# EAGLE board NSL_Annoy (EAGLE 5.11)
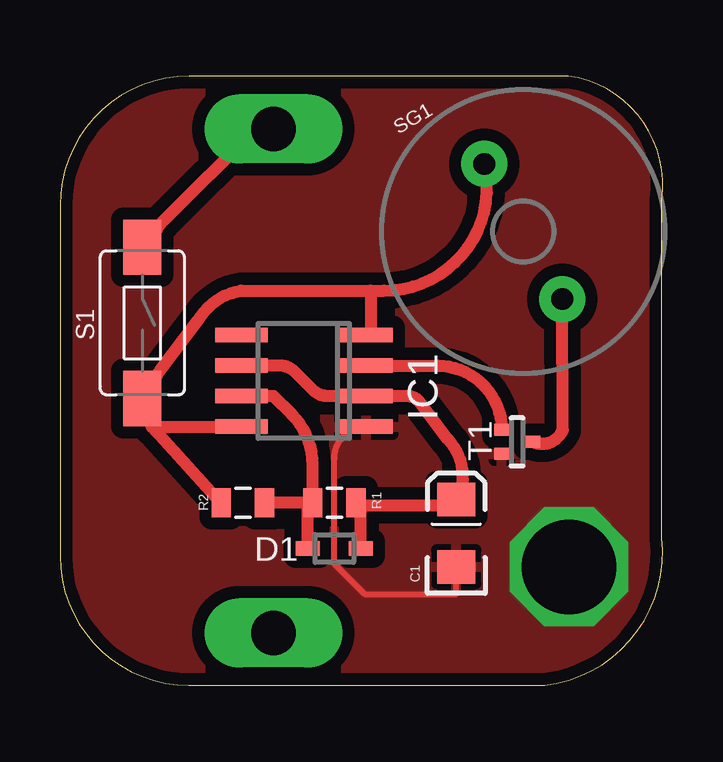
[diagram p0: board, top side]
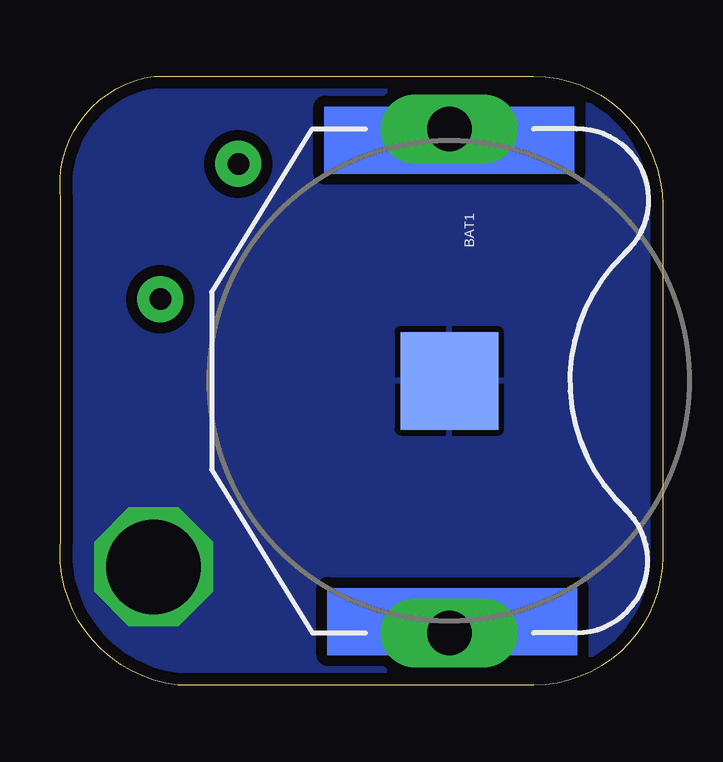
[diagram p1: board, bottom side, seen from below]

Size 25.11 x 25.38 mm. Coordinates in mm from the lower left corner, seen from the top.
Outline: 20.2,0 arc90 25.07,6.14 25.07,20.22 arc90 21.18,25.38 5.39,25.38 arc90 0,19.99 0,5.37 arc90 5.37,0 20.2,0
Copper layers (1*16): Top 0.0356mm / dielectric 1.5011mm / Bottom 0.0356mm
Design rules "SilverCircuits *": minimum track width 7mil, minimum drill 14mil, track to track 7mil, track to pad 7mil, pad to pad 7mil, via to via 7mil, smd to smd 0mil, copper to edge 20mil, drill to drill 8mil, minimum pad ring 10mil, minimum via ring 8mil, stop-mask expansion 4mil, vias tented up to drill 0mil, thermal gap 10mil
Net classes: 0 default: width 0.508 mm
Milling: 8 lines

## Footprints (pad centres in the part's own frame; a part is rotated, then mirrored left to right if it is on the bottom)
BATTERY_20MM_PTH_COMPACT = drill 1.854 long: 1 -10.5,0; 3 10.5,0 | smd 4.064 x 4.064: 2 0,0
EIA3216 = smd 1.4 x 1.6: A 1.4,0; C -1.4,0
SOD323 = smd 1 x 0.6: 1 -1.1,0; 2 1.1,0
SO08 = smd 0.6 x 2.2: 1 -1.905,-2.6; 2 -0.635,-2.6; 3 0.635,-2.6; 4 1.905,-2.6; 5 1.905,2.6; 6 0.635,2.6; 7 -0.635,2.6; 8 -1.905,2.6
0805 = smd 0.8 x 1.2: 1 -0.9,0; 2 0.9,0
SPARKFUN_TACTILE-SWITCH-1101NE = smd 2.3 x 1.6: P$1 -3.15,0; P$2 3.15,0
BUZZER-12MM-NS = drill 0.9 round: + 3.25,0; - -3.25,0
SOT416 = smd 0.6 x 0.5: 1 0.65,-0.5; 2 0.65,0.5; 3 -0.65,0

## Placement (x,y rotation side)
BAT1  [BATTERY_20MM_PTH_COMPACT]  8.89,12.68 270 bottom
C1  10uF  [EIA3216]  16.51,6.33 90 top
D1  1n914  [SOD323]  11.43,5.7 180 top
IC1  NE555D  [SO08]  10.16,12.68 90 top
R1  10Mohm  [0805]  11.43,7.6 0 top
R2  20K  [0805]  7.62,7.6 180 top
S1  [SPARKFUN_TACTILE-SWITCH-1101NE]  3.43,15.09 270 top
SG1  BUZZER  [BUZZER-12MM-NS]  19.3,18.9 120 top
T1  [SOT416]  19.05,10.14 180 top

## Library data of the parts
BAT1 = SparkFun; OC_NEWARK: unknown
C1 = SparkFun; MF: VISHAY/SPRAGUE; MPN: 293D106X96R3A2TE3; OC_NEWARK: 09K5861
D1 = zetex; MPN: CDSOD323-T05C; OC_FARNELL: 1824860; OC_NEWARK: 79R6078
IC1 = linear; MF: TEXAS INSTRUMENTS; MPN: NE555DR; OC_NEWARK: 75C4440
R1 = SparkFun; MPN: MCHP05W4F1005T5E; OC_NEWARK: 01N6992
R2 = SparkFun; MPN: RC0805JR-0720KL; OC_NEWARK: 68R0266
S1 = Nullspace; OC_NEWARK: unknown
SG1 = SparkFun; MPN: ABT-436-RC; OC_NEWARK: 25M7506
T1 = tvbgone-adj

## Nets
2: C1.A D1.1 IC1.2 IC1.6 R1.2
3: IC1.3 T1.1
5: IC1.5
7: D1.2 IC1.7 R1.1 R2.1
GND: BAT1.2 C1.C IC1.1 T1.2
N$1: BAT1.1 S1.P$1
N$9: SG1.- T1.3
VCC: IC1.4 IC1.8 R2.2 S1.P$2 SG1.+

## Tracks (layer width: path | path; a pad name or v marks a point on that pad's centre or on a via)
2
  Top 0.508: IC1.6 9.15,13.32 arc-45 9.79,13.05 10.53,12.31 arc45 11.17,12.04 IC1.2 14.47,12.04 arc-45 14.96,11.84 16.16,10.26 arc-45 16.79,8.57 16.79,7.57 16.56,7.5 | D1.1 12.53,7.6 12.34,7.6 R1.2 12.55,7.27 12.62,7.5 16.56,7.5 | 16.56,7.5 C1.A
3
  Top 0.508: IC1.3 15.73,13.32 arc-90 T1.1
7
  Top 0.508: IC1.7 8.89,12.04 9.67,11.26 arc-45 10.53,9.2 R1.1 10.24,7.6 | 10.24,7.6 R2.1 | D1.2 10.33,7.37 | 10.33,7.37 10.33,7.6 | 10.33,7.37 10.34,7.37 10.24,7.6
GND  (via drill 3.94)
  Top 0.254: IC1.1 arc90 11.43,9.45 11.43,5.06 12.7,3.79 16.51,3.79 C1.C
  other vias: 21.21,4.93
  pour Bottom (isolate 0.457): 25.4,20.8 arc90 20.82,25.38 5.39,25.38 arc90 0,19.99 0,5.37 arc90 5.39,-0.02 18.92,-0.02 arc90 25.4,6.46
  pour Top (isolate 0.508): 25.4,20.8 arc90 20.82,25.38 5.68,25.38 arc90 0,19.7 0,5.37 arc90 5.39,-0.02 18.92,-0.02 arc90 25.4,6.46
N$1
  Top 0.508: S1.P$1 3.81,18.16 arc-45 4.3,19.34 8.13,23.17 BAT1.1
N$9
  Top 0.508: T1.3 arc90 20.96,10.63 SG1.-
VCC
  Top 0.508: 3.99,10.6 3.81,10.77 | 3.99,10.6 4.17,10.42 6.71,7.6 R2.2 6.73,7.6 | 3.99,10.77 IC1.8 | 3.91,11 3.91,10.9 | 3.91,11 3.91,11.94 | 3.91,11.94 3.91,12.39 arc-40 4.18,13.13 5.75,15.19 arc-50 7.54,16.44 12.94,16.44 | 12.94,16.44 13.5,16.44 arc103 SG1.+ | 12.94,16.44 12.94,14.77 12.78,14.59 IC1.4 | 3.99,10.6 3.99,10.77 | 3.99,10.77 3.91,11 | S1.P$2 | 3.91,11.94 S1.P$2
(copper drawn outside any net)
  shapes: Bottom area x2

## Text on the board
_tsilk: [NSL]